# Altium PCB Starboard Solar Panel.PcbDoc (part 2 of 2)
Units mm, origin at the board's own origin, x right, y up, seen from the top; angles counter-clockwise.
Board outline 327.5 x 87 mm, 2 copper layers (Top Layer, Bottom Layer), stack 1.58 mm thick; 64 components, 43 nets, 245 pads, 1257 vias.
Unrouted connection lines stored in the file: 47.
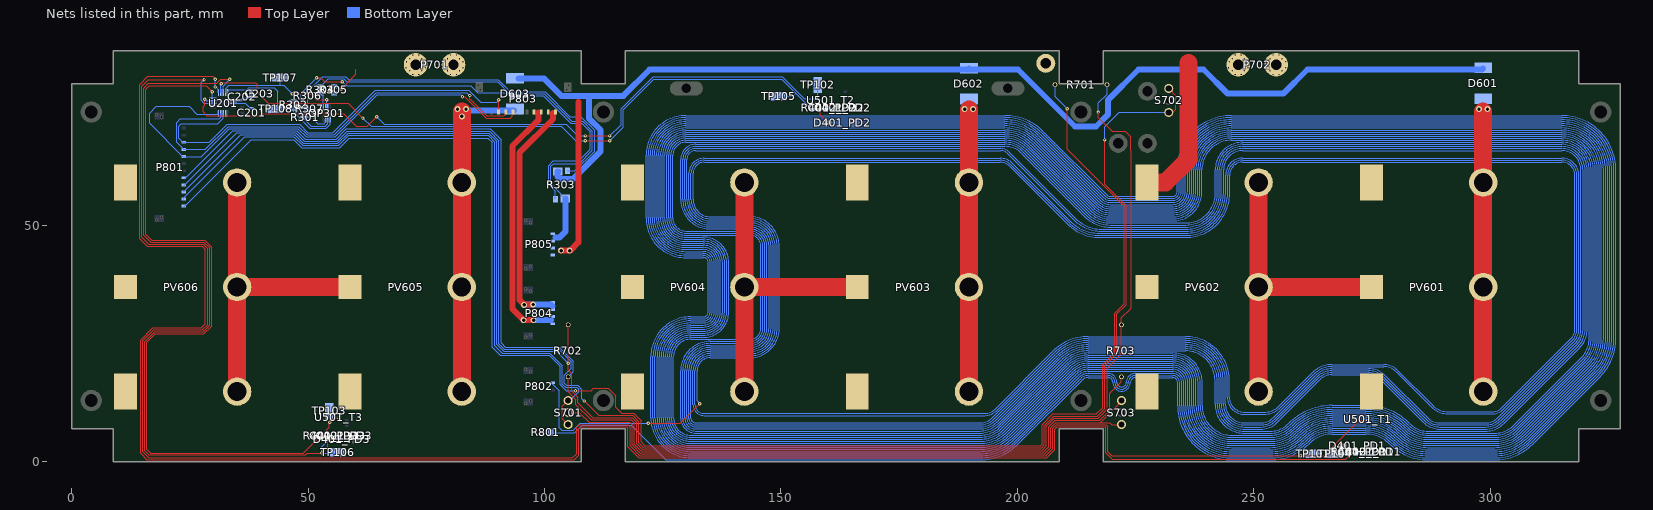
[diagram p2: the nets of this part, all layers, seen from the top]

## Via types
v1: diameter 0.711, hole 0.3, Top Layer to Bottom Layer, tented both sides, 677 vias
v2: diameter 0.8, hole 0.5, Top Layer to Bottom Layer, 519 vias
v3: diameter 0.655, hole 0.25, Top Layer to Bottom Layer, 48 vias
v4: diameter 1.27, hole 0.711, Top Layer to Bottom Layer, tented both sides, 13 vias

## Nets (pads, with @x,y where several pads share a name; then routed paths per layer and width w, separated by ;. In a path a pad name is that pad's centre, name@x,y a point inside that pad or via, vN(x,y) a via of type N, cw(c..) or ccw(c..) an arc to the next point about the centre after c; other vN are vias at no path point) (continued)
MAG2: P802.2 R801.1 | length 11911.1
  Top Layer w0.254: v1(121.9,8.2) 128.745,8.2 v1(132.855,12.31)
  Bottom Layer w0.254: R801.1@101.325,6.3 101.475,6.15 106.339,6.15 107.952,7.762 118.342,7.762 125.629,0.476 127.132,0.476 192.095,0.476 ; P802.2@101.656,16.575 103.149,15.082 103.149,7.201 103.687,6.663 106.063,6.663 107.6,8.2 v1(121.9,8.2) ; 127.264,22.296 127.264,9.32 ccw(c130.9,9.32) 130.9,5.684 192.095,5.684 ; 127.264,22.326 cw(c130.9,22.296) 130.9,25.932 143.4,25.932 ccw(c143.4,28.266) 145.734,28.266 145.734,45.64 ccw(c143.4,45.64) 143.4,47.974 129.84,47.974 cw(c129.87,51.61) 126.234,51.61 126.234,64.83 cw(c129.87,64.83) 126.234,64.86 cw(c129.87,64.83) 129.87,68.466 197.37,68.466 cw(c197.37,61.792) 202.089,66.511 215.5,53.1 ccw(c219.583,57.183) 219.583,51.409 232.8,51.409 ccw(c232.8,57.183) 238.574,57.183 238.574,61.792 cw(c245.248,61.792) 245.248,68.466 315.1,68.466 cw(c315.1,61.792) 321.774,61.792 321.774,26.1 cw(c315.1,26.1) 319.819,21.381 305.619,7.181 cw(c300.9,11.9) 300.9,5.226 286.8,5.226 cw(c286.8,11.9) 282.081,7.181 ccw(c273.679,-1.221) 273.679,10.661 266.6,10.661 ccw(c266.6,-1.221) 258.198,7.181 cw(c253.479,11.9) 253.479,5.226 245.3,5.226 cw(c245.3,11.9) 238.626,11.9 238.626,16.85 ccw(c232.852,16.85) 232.852,22.624 215,22.624 ccw(c215,15.95) 210.281,20.669 ; 129.87,68.032 197.37,68.032 cw(c197.37,61.792) 201.782,66.204 215.193,52.793 ccw(c219.583,57.183) 219.583,50.975 232.8,50.975 ccw(c232.8,57.183) 239.008,57.183 239.008,61.792 cw(c245.248,61.792) 245.248,68.032 ; 129.87,68.032 ccw(c129.87,64.83) 126.668,64.86 ccw(c129.87,64.83) 126.668,64.83 126.668,51.61 ccw(c129.87,51.61) 129.84,48.408 143.4,48.408 cw(c143.4,45.64) 146.168,45.64 146.168,28.266 cw(c143.4,28.266) 143.4,25.498 135.02,25.498 ccw(c135.02,19.258) 128.78,19.258 128.78,9.288 ccw(c131.95,9.288) 131.95,6.118 192.095,6.118 ; 131.384,19.258 131.384,12.134 ccw(c133.686,12.134) 133.686,9.832 ; 131.384,19.288 cw(c135.02,19.258) 135.02,22.894 143.4,22.894 ; 131.818,19.258 131.818,12.134 ccw(c133.686,12.134) 133.686,10.266 ; 131.818,19.288 cw(c135.02,19.258) 135.02,22.46 143.4,22.46 ; v1(132.855,12.31) 132.252,12.913 132.252,19.288 cw(c135.02,19.258) 135.02,22.026 143.4,22.026 ; 133.736,63.36 ccw(c133.736,61.026) 131.402,61.026 131.402,55.516 ccw(c135.038,55.516) 135.008,51.88 143.4,51.88 ; 133.736,63.794 ccw(c133.736,61.026) 130.968,61.026 130.968,55.516 ccw(c135.038,55.516) 135.038,51.446 143.4,51.446 cw(c143.4,45.64) 149.206,45.68 ; 133.736,64.228 ccw(c133.736,61.026) 130.534,61.026 130.534,55.516 ccw(c135.038,55.516) 135.038,51.012 143.4,51.012 cw(c143.4,45.64) 148.772,45.68 ; 133.8,9.832 193.208,9.832 ccw(c193.208,13.034) 195.472,10.77 ; 133.8,10.266 193.208,10.266 ccw(c193.208,13.034) 195.165,11.077 207.519,23.431 cw(c215,15.95) 215,26.53 235.552,26.53 cw(c235.552,17.252) 244.83,17.252 244.83,13.697 ccw(c248,13.697) 248,10.527 252.169,10.527 ccw(c252.169,15.031) 255.354,11.846 262.397,18.89 ; 133.9,63.36 196.37,63.36 cw(c196.37,60.592) 198.327,62.549 210.538,50.338 ccw(c217.383,57.183) 217.383,47.503 ; 133.9,63.794 196.37,63.794 cw(c196.37,60.592) 198.634,62.856 210.845,50.645 ccw(c217.383,57.183) 217.383,47.937 ; 133.9,64.228 196.37,64.228 cw(c196.37,60.592) 198.941,63.163 211.152,50.952 ccw(c217.383,57.183) 217.383,48.371 ; 143.4,23.328 135.02,23.328 ccw(c135.02,19.258) 130.95,19.258 130.95,9.288 ccw(c131.95,9.288) 131.95,8.288 192.095,8.288 ; 143.4,23.762 135.02,23.762 ccw(c135.02,19.258) 130.516,19.258 130.516,9.288 ccw(c131.95,9.288) 131.95,7.854 192.095,7.854 ; 143.4,24.196 135.02,24.196 ccw(c135.02,19.258) 130.082,19.258 130.082,9.288 ccw(c131.95,9.288) 131.95,7.42 192.095,7.42 ; 143.4,24.63 135.02,24.63 ccw(c135.02,19.258) 129.648,19.258 129.648,9.288 ccw(c131.95,9.288) 131.95,6.986 192.095,6.986 ; 143.4,25.064 135.02,25.064 ccw(c135.02,19.258) 129.214,19.258 129.214,9.288 ccw(c131.95,9.288) 131.95,6.552 192.095,6.552 ; 143.4,50.144 135.038,50.144 cw(c135.038,55.516) 129.666,55.516 129.666,63.962 cw(c132,63.962) 132,66.296 196.5,66.296 cw(c196.5,63.962) 198.15,65.612 ; 143.4,50.144 cw(c143.4,45.64) 147.904,45.68 ; 143.4,51.88 cw(c143.4,45.64) 149.64,45.68 ; 143.44,22.026 ccw(c143.4,28.266) 149.64,28.266 149.64,45.64 ; 143.44,22.46 ccw(c143.4,28.266) 149.206,28.266 149.206,45.64 ; 143.44,22.894 ccw(c143.4,28.266) 148.772,28.266 148.772,45.64 ; 143.44,23.328 ccw(c143.4,28.266) 148.338,28.266 148.338,45.64 ; 143.44,23.762 ccw(c143.4,28.266) 147.904,28.266 147.904,45.64 ; 143.44,24.196 ccw(c143.4,28.266) 147.47,28.266 147.47,45.64 ; 143.44,24.63 ccw(c143.4,28.266) 147.036,28.266 147.036,45.64 ; 143.44,25.064 ccw(c143.4,28.266) 146.602,28.266 146.602,45.64 ; 146.602,45.68 ccw(c143.4,45.64) 143.4,48.842 129.84,48.842 cw(c129.87,51.61) 127.102,51.61 127.102,64.83 cw(c129.87,64.83) 127.102,64.86 cw(c129.87,64.83) 129.87,67.598 197.37,67.598 cw(c197.37,61.792) 201.475,65.897 214.886,52.486 ccw(c219.583,57.183) 219.583,50.541 235.602,50.541 ccw(c235.602,56.781) 241.842,56.781 241.842,61.792 cw(c247.648,61.792) 241.842,61.834 cw(c247.648,61.792) 247.648,67.598 315.1,67.598 cw(c315.1,61.792) 320.906,61.792 320.906,26.1 cw(c315.1,26.1) 319.205,21.995 305.005,7.795 cw(c300.9,11.9) 300.9,6.094 286.8,6.094 cw(c286.8,11.9) 282.695,7.795 ccw(c273.679,-1.221) 273.679,11.529 266.6,11.529 ccw(c266.6,-1.221) 257.584,7.795 cw(c253.479,11.9) 253.479,6.094 248,6.094 cw(c248,12.302) 241.792,12.302 241.792,17.252 ccw(c235.552,17.252) 235.552,23.492 215,23.492 ccw(c215,15.95) 209.667,21.283 196.2,7.816 cw(c192.095,11.921) 192.095,6.115 ; 147.036,45.68 ccw(c143.4,45.64) 143.4,49.276 135.038,49.276 cw(c135.038,55.516) 128.798,55.516 128.798,63.962 cw(c132,63.962) 132,67.164 197.37,67.164 cw(c197.37,61.792) 201.169,65.591 214.58,52.18 ccw(c219.583,57.183) 219.583,50.107 235.602,50.107 ccw(c235.602,56.781) 242.276,56.781 242.276,61.792 cw(c247.648,61.792) 242.276,61.834 cw(c247.648,61.792) 247.648,67.164 315.1,67.164 cw(c315.1,61.792) 320.472,61.792 320.472,28 cw(c315.1,28) 318.899,24.201 302.799,8.101 cw(c299,11.9) 299,6.528 286.8,6.528 cw(c286.8,11.9) 283.001,8.101 ccw(c273.679,-1.221) 273.679,11.963 266.6,11.963 ccw(c266.6,-1.221) 257.278,8.101 cw(c253.479,11.9) 253.479,6.528 248,6.528 cw(c248,12.302) 242.226,12.302 242.226,17.252 ccw(c235.552,17.252) 235.552,23.926 215,23.926 ccw(c215,15.95) 209.36,21.59 ; 147.47,45.68 ccw(c143.4,45.64) 143.4,49.71 135.038,49.71 cw(c135.038,55.516) 129.232,55.516 129.232,63.962 cw(c132,63.962) 132,66.73 197.37,66.73 cw(c197.37,61.792) 200.862,65.284 214.273,51.873 ccw(c219.583,57.183) 219.583,49.673 235.602,49.673 ccw(c235.602,56.781) 242.71,56.781 242.71,61.792 cw(c247.648,61.792) 242.71,61.834 cw(c247.648,61.792) 247.648,66.73 315.1,66.73 cw(c315.1,61.792) 320.038,61.792 320.038,28 cw(c315.1,28) 318.592,24.508 302.492,8.408 cw(c299,11.9) 299,6.962 289.3,6.962 cw(c289.3,11.9) 285.808,8.408 276.858,17.358 ; 148.338,45.68 ccw(c143.4,45.64) 143.4,50.578 135.038,50.578 cw(c135.038,55.516) 130.1,55.516 130.1,63.962 cw(c132,63.962) 132,65.862 196.5,65.862 cw(c196.5,63.962) 197.844,65.305 ; 192.095,0.473 ccw(c192.095,11.921) 200.19,3.826 213.657,17.293 ; 192.095,0.907 ccw(c192.095,11.921) 199.883,4.133 213.35,17.6 ; 192.095,0.91 130.9,0.91 cw(c130.9,9.32) 122.49,9.32 122.49,22.296 cw(c130.9,22.296) 130.9,30.706 133.6,30.706 ccw(c133.6,31.706) 134.6,31.706 134.6,42.2 ccw(c133.6,42.2) 133.6,43.2 129.87,43.2 cw(c129.87,51.61) 121.46,51.61 121.46,64.83 cw(c129.87,64.83) 129.87,73.24 197.37,73.24 cw(c197.37,61.792) 205.465,69.887 218.876,56.476 ccw(c219.583,57.183) 219.583,56.183 232.8,56.183 ccw(c232.8,57.183) 233.8,57.183 233.8,61.792 cw(c245.248,61.792) 245.248,73.24 315.1,73.24 cw(c315.1,61.792) 326.548,61.792 326.548,26.1 cw(c315.1,26.1) 323.195,18.005 308.995,3.805 cw(c300.9,11.9) 300.9,0.452 286.8,0.452 cw(c286.8,11.9) 278.705,3.805 ccw(c273.679,-1.221) 273.679,5.887 266.6,5.887 ccw(c266.6,-1.221) 261.574,3.805 cw(c253.479,11.9) 253.479,0.452 245.3,0.452 cw(c245.3,11.9) 233.852,11.9 233.852,16.85 ccw(c232.852,16.85) 232.852,17.85 224.9,17.85 ccw(c224.9,16.85) 223.9,16.85 cw(c222.032,16.85) 222.032,14.982 cw(c222.032,16.85) 220.164,16.85 ccw(c219.164,16.85) 219.164,17.85 215,17.85 ccw(c215,15.95) 213.656,17.294 ; 192.095,1.341 ccw(c192.095,11.921) 199.576,4.44 213.043,17.907 ; 192.095,1.344 130.9,1.344 cw(c130.9,9.32) 122.924,9.32 122.924,22.296 cw(c130.9,22.296) 130.9,30.272 133.6,30.272 ccw(c133.6,31.706) 135.034,31.706 135.034,42.2 ccw(c133.6,42.2) 133.6,43.634 129.87,43.634 cw(c129.87,51.61) 121.894,51.61 121.894,64.83 cw(c129.87,64.83) 129.87,72.806 197.37,72.806 cw(c197.37,61.792) 205.158,69.58 218.569,56.169 ccw(c219.583,57.183) 219.583,55.749 232.8,55.749 ccw(c232.8,57.183) 234.234,57.183 234.234,61.792 cw(c245.248,61.792) 245.248,72.806 315.1,72.806 cw(c315.1,61.792) 326.114,61.792 326.114,26.1 cw(c315.1,26.1) 322.888,18.312 308.688,4.112 cw(c300.9,11.9) 300.9,0.886 286.8,0.886 cw(c286.8,11.9) 279.012,4.112 ccw(c273.679,-1.221) 273.679,6.321 266.6,6.321 ccw(c266.6,-1.221) 261.267,4.112 cw(c253.479,11.9) 253.479,0.886 245.3,0.886 cw(c245.3,11.9) 234.286,11.9 234.286,16.85 ccw(c232.852,16.85) 232.852,18.284 224.9,18.284 ccw(c224.9,16.85) 223.466,16.85 cw(c222.032,16.85) 222.032,15.416 cw(c222.032,16.85) 220.598,16.85 ccw(c219.164,16.85) 219.164,18.284 215,18.284 ccw(c215,15.95) 213.35,17.6 ; 192.095,1.775 ccw(c192.095,11.921) 199.269,4.747 212.736,18.214 ; 192.095,1.778 130.9,1.778 cw(c130.9,9.32) 123.358,9.32 123.358,22.296 cw(c130.9,22.296) 130.9,29.838 133.6,29.838 ccw(c133.6,31.706) 135.468,31.706 135.468,42.2 ccw(c133.6,42.2) 133.6,44.068 129.87,44.068 cw(c129.87,51.61) 122.328,51.61 122.328,64.83 cw(c129.87,64.83) 129.87,72.372 197.37,72.372 cw(c197.37,61.792) 204.851,69.273 218.262,55.862 ccw(c219.583,57.183) 219.583,55.315 232.8,55.315 ccw(c232.8,57.183) 234.668,57.183 234.668,61.792 cw(c245.248,61.792) 245.248,72.372 315.1,72.372 cw(c315.1,61.792) 325.68,61.792 325.68,26.1 cw(c315.1,26.1) 322.581,18.619 308.381,4.419 cw(c300.9,11.9) 300.9,1.32 286.8,1.32 cw(c286.8,11.9) 279.319,4.419 ccw(c273.679,-1.221) 273.679,6.755 266.6,6.755 ccw(c266.6,-1.221) 260.96,4.419 cw(c253.479,11.9) 253.479,1.32 245.3,1.32 cw(c245.3,11.9) 234.72,11.9 234.72,16.85 ccw(c232.852,16.85) 232.852,18.718 224.9,18.718 ccw(c224.9,16.85) 223.032,16.85 cw(c222.032,16.85) 222.032,15.85 cw(c222.032,16.85) 221.032,16.85 ccw(c219.164,16.85) 219.164,18.718 215,18.718 ccw(c215,15.95) 213.043,17.907 ; 192.095,2.209 ccw(c192.095,11.921) 198.962,5.054 212.429,18.521 cw(c215,15.95) 215,19.586 232.852,19.586 cw(c232.852,16.85) 235.588,16.85 235.588,11.9 ccw(c245.3,11.9) 245.3,2.188 253.479,2.188 ccw(c253.479,11.9) 260.346,5.033 cw(c266.6,-1.221) 266.6,7.623 273.679,7.623 cw(c273.679,-1.221) 279.933,5.033 ccw(c286.8,11.9) 286.8,2.188 300.9,2.188 ccw(c300.9,11.9) 307.767,5.033 321.967,19.233 ccw(c315.1,26.1) 324.812,26.1 324.812,61.792 ccw(c315.1,61.792) 315.1,71.504 245.248,71.504 ccw(c245.248,61.792) 235.536,61.792 235.536,57.183 cw(c232.8,57.183) 232.8,54.447 219.583,54.447 cw(c219.583,57.183) 217.648,55.248 204.237,68.659 ccw(c197.37,61.792) 197.37,71.504 129.87,71.504 ccw(c129.87,64.83) 123.196,64.83 123.196,51.61 ccw(c129.87,51.61) 129.87,44.936 133.6,44.936 cw(c133.6,42.2) 136.336,42.2 136.336,31.706 cw(c133.6,31.706) 133.6,28.97 130.9,28.97 ccw(c130.9,22.296) 124.226,22.296 124.226,9.32 ccw(c130.9,9.32) 130.9,2.646 192.095,2.646 ; 192.095,2.212 130.9,2.212 cw(c130.9,9.32) 123.792,9.32 123.792,22.296 cw(c130.9,22.296) 130.9,29.404 133.6,29.404 ccw(c133.6,31.706) 135.902,31.706 135.902,42.2 ccw(c133.6,42.2) 133.6,44.502 129.87,44.502 cw(c129.87,51.61) 122.762,51.61 122.762,64.83 cw(c129.87,64.83) 129.87,71.938 197.37,71.938 cw(c197.37,61.792) 204.544,68.966 ; 192.095,2.643 ccw(c192.095,11.921) 198.656,5.36 212.123,18.827 ; 192.095,3.077 ccw(c192.095,11.921) 198.349,5.667 211.816,19.134 ; 192.095,3.08 130.9,3.08 cw(c130.9,9.32) 124.66,9.32 124.66,22.296 cw(c130.9,22.296) 130.9,28.536 133.6,28.536 ccw(c133.6,31.706) 136.77,31.706 136.77,42.2 ccw(c133.6,42.2) 133.6,45.37 129.87,45.37 cw(c129.87,51.61) 123.63,51.61 123.63,64.83 cw(c129.87,64.83) 129.87,71.07 197.37,71.07 cw(c197.37,61.792) 203.931,68.353 217.342,54.942 ccw(c219.583,57.183) 219.583,54.013 232.8,54.013 ccw(c232.8,57.183) 235.97,57.183 235.97,61.792 cw(c245.248,61.792) 245.248,71.07 315.1,71.07 cw(c315.1,61.792) 324.378,61.792 324.378,26.1 cw(c315.1,26.1) 321.661,19.539 307.461,5.339 cw(c300.9,11.9) 300.9,2.622 286.8,2.622 cw(c286.8,11.9) 280.239,5.339 ccw(c273.679,-1.221) 273.679,8.057 266.6,8.057 ccw(c266.6,-1.221) 260.039,5.339 cw(c253.479,11.9) 253.479,2.622 245.3,2.622 cw(c245.3,11.9) 236.022,11.9 236.022,16.85 ccw(c232.852,16.85) 232.852,20.02 215,20.02 ccw(c215,15.95) 212.122,18.828 ; 192.095,3.511 ccw(c192.095,11.921) 198.042,5.974 211.509,19.441 cw(c215,15.95) 215,20.888 232.852,20.888 cw(c232.852,16.85) 236.89,16.85 236.89,11.9 ccw(c245.3,11.9) 245.3,3.49 253.479,3.49 ccw(c253.479,11.9) 259.426,5.953 cw(c266.6,-1.221) 266.6,8.925 273.679,8.925 cw(c273.679,-1.221) 280.853,5.953 ccw(c286.8,11.9) 286.8,3.49 300.9,3.49 ccw(c300.9,11.9) 306.847,5.953 321.047,20.153 ccw(c315.1,26.1) 323.51,26.1 323.51,61.792 ccw(c315.1,61.792) 315.1,70.202 245.248,70.202 ccw(c245.248,61.792) 236.838,61.792 236.838,57.183 cw(c232.8,57.183) 232.8,53.145 219.583,53.145 cw(c219.583,57.183) 216.728,54.328 203.317,67.739 ccw(c197.37,61.792) 197.37,70.202 129.87,70.202 ccw(c129.87,64.83) 124.498,64.83 124.498,51.61 ccw(c129.87,51.61) 129.87,46.238 133.6,46.238 cw(c133.6,42.2) 137.638,42.2 137.638,31.706 cw(c133.6,31.706) 137.638,31.674 cw(c133.6,31.706) 133.6,27.668 130.9,27.668 ccw(c130.9,22.296) 125.528,22.296 125.528,9.32 ccw(c130.9,9.32) 130.9,3.948 192.095,3.948 ; 192.095,3.514 130.9,3.514 cw(c130.9,9.32) 125.094,9.32 125.094,22.296 cw(c130.9,22.296) 130.9,28.102 133.6,28.102 ccw(c133.6,31.706) 137.204,31.674 ccw(c133.6,31.706) 137.204,31.702 137.204,42.2 ccw(c133.6,42.2) 133.6,45.804 129.87,45.804 cw(c129.87,51.61) 124.064,51.61 124.064,64.83 cw(c129.87,64.83) 129.87,70.636 197.37,70.636 cw(c197.37,61.792) 203.624,68.046 217.035,54.635 ccw(c219.583,57.183) 219.583,53.579 232.8,53.579 ccw(c232.8,57.183) 236.404,57.183 236.404,61.792 cw(c245.248,61.792) 245.248,70.636 315.1,70.636 cw(c315.1,61.792) 323.944,61.792 323.944,26.1 cw(c315.1,26.1) 321.354,19.846 307.154,5.646 cw(c300.9,11.9) 300.9,3.056 286.8,3.056 cw(c286.8,11.9) 280.546,5.646 ccw(c273.679,-1.221) 273.679,8.491 266.6,8.491 ccw(c266.6,-1.221) 259.733,5.646 cw(c253.479,11.9) 253.479,3.056 245.3,3.056 cw(c245.3,11.9) 236.456,11.9 236.456,16.85 ccw(c232.852,16.85) 232.852,20.454 215,20.454 ccw(c215,15.95) 211.815,19.135 ; 192.095,3.945 ccw(c192.095,11.921) 197.735,6.281 211.202,19.748 ; 192.095,4.379 ccw(c192.095,11.921) 197.428,6.588 210.895,20.055 ; 192.095,4.382 130.9,4.382 cw(c130.9,9.32) 125.962,9.32 125.962,22.296 cw(c130.9,22.296) 130.9,27.234 133.6,27.234 ccw(c133.6,31.706) 138.072,31.674 ccw(c133.6,31.706) 138.072,31.706 138.072,42.2 ccw(c133.6,42.2) 133.6,46.672 129.87,46.672 cw(c129.87,51.61) 124.932,51.61 124.932,64.83 cw(c129.87,64.83) 129.87,69.768 197.37,69.768 cw(c197.37,61.792) 203.01,67.432 216.421,54.021 ccw(c219.583,57.183) 219.583,52.711 232.8,52.711 ccw(c232.8,57.183) 237.272,57.183 237.272,61.792 cw(c245.248,61.792) 245.248,69.768 315.1,69.768 cw(c315.1,61.792) 323.076,61.792 323.076,26.1 cw(c315.1,26.1) 320.74,20.46 306.54,6.26 cw(c300.9,11.9) 300.9,3.924 286.8,3.924 cw(c286.8,11.9) 281.16,6.26 ccw(c273.679,-1.221) 273.679,9.359 266.6,9.359 ccw(c266.6,-1.221) 259.119,6.26 cw(c253.479,11.9) 253.479,3.924 245.3,3.924 cw(c245.3,11.9) 237.324,11.9 237.324,16.85 ccw(c232.852,16.85) 232.852,21.322 215,21.322 ccw(c215,15.95) 211.201,19.749 ; 192.095,4.813 ccw(c192.095,11.921) 197.121,6.895 210.588,20.362 cw(c215,15.95) 215,22.19 232.852,22.19 cw(c232.852,16.85) 238.192,16.85 238.192,11.9 ccw(c245.3,11.9) 245.3,4.792 253.479,4.792 ccw(c253.479,11.9) 258.505,6.874 cw(c266.6,-1.221) 266.6,10.227 273.679,10.227 cw(c273.679,-1.221) 281.774,6.874 ccw(c286.8,11.9) 286.8,4.792 300.9,4.792 ccw(c300.9,11.9) 305.926,6.874 320.126,21.074 ccw(c315.1,26.1) 322.208,26.1 322.208,61.792 ccw(c315.1,61.792) 315.1,68.9 245.248,68.9 ccw(c245.248,61.792) 238.14,61.792 238.14,57.183 cw(c232.8,57.183) 232.8,51.843 219.583,51.843 cw(c219.583,57.183) 215.807,53.407 202.396,66.818 ccw(c197.37,61.792) 197.37,68.9 129.87,68.9 ccw(c129.87,64.83) 125.8,64.83 125.8,51.61 ccw(c129.87,51.61) 129.87,47.54 133.6,47.54 cw(c133.6,42.2) 138.94,42.2 138.94,31.701 cw(c133.6,31.706) 138.94,31.674 cw(c133.6,31.706) 133.6,26.366 130.9,26.366 ccw(c130.9,22.296) 126.83,22.296 126.83,9.32 ccw(c130.9,9.32) 130.9,5.25 192.095,5.25 ; 192.095,4.816 130.9,4.816 cw(c130.9,9.32) 126.396,9.32 126.396,22.296 cw(c130.9,22.296) 130.9,26.8 133.6,26.8 ccw(c133.6,31.706) 138.506,31.674 ccw(c133.6,31.706) 138.506,31.697 138.506,42.2 ccw(c133.6,42.2) 133.6,47.106 129.87,47.106 cw(c129.87,51.61) 125.366,51.61 125.366,64.83 cw(c129.87,64.83) 129.87,69.334 197.37,69.334 cw(c197.37,61.792) 202.703,67.125 216.114,53.714 ccw(c219.583,57.183) 219.583,52.277 232.8,52.277 ccw(c232.8,57.183) 237.706,57.183 237.706,61.792 cw(c245.248,61.792) 245.248,69.334 315.1,69.334 cw(c315.1,61.792) 322.642,61.792 322.642,26.1 cw(c315.1,26.1) 320.433,20.767 306.233,6.567 cw(c300.9,11.9) 300.9,4.358 286.8,4.358 cw(c286.8,11.9) 281.467,6.567 ccw(c273.679,-1.221) 273.679,9.793 266.6,9.793 ccw(c266.6,-1.221) 258.812,6.567 cw(c253.479,11.9) 253.479,4.358 245.3,4.358 cw(c245.3,11.9) 237.758,11.9 237.758,16.85 ccw(c232.852,16.85) 232.852,21.756 215,21.756 ccw(c215,15.95) 210.895,20.055 ; 192.095,5.247 ccw(c192.095,11.921) 196.814,7.202 210.281,20.669 ; 192.095,5.681 ccw(c192.095,11.921) 196.507,7.509 209.974,20.976 ; 192.095,6.549 ccw(c192.095,11.921) 195.894,8.122 209.361,21.589 ; 192.095,6.983 ccw(c192.095,11.921) 195.587,8.429 209.054,21.896 ; 192.095,7.417 ccw(c192.095,11.921) 195.28,8.736 208.747,22.203 ; 192.095,7.851 ccw(c192.095,11.921) 194.973,9.043 208.44,22.51 ; 192.095,8.285 ccw(c192.095,11.921) 194.666,9.35 ; 194.666,9.35 208.133,22.817 cw(c215,15.95) 215,25.662 235.552,25.662 cw(c235.552,17.252) 243.962,17.252 243.962,12.302 ccw(c248,12.302) 248,8.264 251.487,8.264 ccw(c251.487,11.9) 254.058,9.329 ; 195.472,10.77 207.826,23.124 cw(c215,15.95) 215,26.096 235.552,26.096 cw(c235.552,17.252) 244.396,17.252 244.396,13.697 ccw(c248,13.697) 248,10.093 252.169,10.093 ccw(c252.169,15.031) 255.661,11.539 262.704,18.583 ; 197.848,65.306 211.891,51.263 ; 198.155,65.617 212.198,51.574 212.198,51.566 ccw(c217.815,57.183) 217.815,49.239 235.602,49.239 ccw(c235.602,56.781) 243.144,56.781 243.144,61.792 cw(c247.648,61.792) 243.144,61.834 cw(c247.648,61.792) 247.648,66.296 315.1,66.296 cw(c315.1,61.792) 319.604,61.792 319.604,28 cw(c315.1,28) 318.285,24.815 302.185,8.715 cw(c299,11.9) 299,7.396 289.3,7.396 cw(c289.3,11.9) 286.115,8.715 277.165,17.665 ; 204.544,68.966 217.955,55.555 ccw(c219.583,57.183) 219.583,54.881 232.8,54.881 ccw(c232.8,57.183) 235.102,57.183 235.102,61.792 cw(c245.248,61.792) 245.248,71.938 315.1,71.938 cw(c315.1,61.792) 325.246,61.792 325.246,26.1 cw(c315.1,26.1) 322.274,18.926 308.074,4.726 cw(c300.9,11.9) 300.9,1.754 286.8,1.754 cw(c286.8,11.9) 279.626,4.726 ccw(c273.679,-1.221) 273.679,7.189 266.6,7.189 ccw(c266.6,-1.221) 260.653,4.726 cw(c253.479,11.9) 253.479,1.754 245.3,1.754 cw(c245.3,11.9) 235.154,11.9 235.154,16.85 ccw(c232.852,16.85) 232.852,19.152 215,19.152 ccw(c215,15.95) 212.736,18.214 ; 208.439,22.511 cw(c215,15.95) 215,25.228 235.552,25.228 cw(c235.552,17.252) 243.528,17.252 243.528,12.302 ccw(c248,12.302) 248,7.83 251.487,7.83 ccw(c251.487,11.9) 254.365,9.022 ; 208.746,22.204 cw(c215,15.95) 215,24.794 235.552,24.794 cw(c235.552,17.252) 243.094,17.252 243.094,12.302 ccw(c248,12.302) 248,7.396 251.487,7.396 ccw(c251.487,11.9) 254.672,8.715 263.622,17.665 cw(c266.5,14.787) 266.5,18.857 274.287,18.857 cw(c274.287,14.787) 277.165,17.665 ; 209.053,21.897 cw(c215,15.95) 215,24.36 215.5,24.36 235.552,24.36 cw(c235.552,17.252) 242.66,17.252 242.66,12.302 ccw(c248,12.302) 248,6.962 251.487,6.962 ccw(c251.487,11.9) 254.979,8.408 ; 209.974,20.976 cw(c215,15.95) 215,23.058 232.852,23.058 cw(c232.852,16.85) 239.06,16.85 239.06,11.9 ccw(c245.3,11.9) 245.3,5.66 253.479,5.66 ccw(c253.479,11.9) 257.891,7.488 cw(c266.6,-1.221) 266.6,11.095 273.679,11.095 cw(c273.679,-1.221) 282.388,7.488 ccw(c286.8,11.9) 286.8,5.66 300.9,5.66 ccw(c300.9,11.9) 305.312,7.488 319.512,21.688 ccw(c315.1,26.1) 321.34,26.1 321.34,61.792 ccw(c315.1,61.792) 315.1,68.032 245.248,68.032 ; 211.891,51.259 ccw(c217.815,57.183) 217.815,48.805 235.602,48.805 ccw(c235.602,56.781) 243.578,56.781 243.578,61.792 cw(c247.648,61.792) 243.578,61.834 cw(c247.648,61.792) 247.648,65.862 315.1,65.862 cw(c315.1,61.792) 319.17,61.792 319.17,28 cw(c315.1,28) 317.978,25.122 301.878,9.022 cw(c299,11.9) 299,7.83 289.3,7.83 cw(c289.3,11.9) 286.422,9.022 277.472,17.972 ccw(c274.287,14.787) 274.287,19.291 266.5,19.291 ccw(c266.5,14.787) 263.315,17.972 254.365,9.022 ; 217.4,47.503 235.602,47.503 ccw(c235.602,56.781) 244.88,56.781 244.88,60.642 ; 217.4,47.937 235.602,47.937 ccw(c235.602,56.781) 244.446,56.781 244.446,60.642 ; 217.4,48.371 235.602,48.371 ccw(c235.602,56.781) 244.012,56.781 244.012,60.642 cw(c247.648,60.642) 244.012,60.684 cw(c247.648,60.642) 247.648,64.278 315.1,64.278 cw(c315.1,60.642) 318.736,60.642 318.736,28 cw(c315.1,28) 317.671,25.429 301.571,9.329 cw(c299,11.9) 299,8.264 289.3,8.264 cw(c289.3,11.9) 286.729,9.329 277.779,18.279 ; 244.446,60.684 244.446,60.642 ; 244.88,60.684 244.88,60.642 ; 254.058,9.329 263.008,18.279 cw(c266.5,14.787) 266.5,19.725 274.287,19.725 ; 254.979,8.408 263.929,17.358 cw(c266.5,14.787) 266.5,18.423 274.287,18.423 cw(c274.287,14.787) 276.858,17.358 ; 262.395,18.892 cw(c266.5,14.787) 266.5,20.593 277.487,20.593 cw(c277.487,16.523) 280.365,19.401 ; 262.701,18.586 cw(c266.5,14.787) 266.5,20.159 277.487,20.159 cw(c277.487,16.523) 280.058,19.094 287.508,11.644 ccw(c291,15.136) 291,10.198 300.5,10.198 ccw(c300.5,13.4) 302.764,11.136 317.364,25.736 ccw(c315.1,28) 318.302,28 318.302,60.642 ccw(c315.1,60.642) 315.1,63.844 247.648,63.844 ccw(c247.648,60.642) 244.446,60.642 ; 274.287,19.725 cw(c274.287,14.787) 277.779,18.279 ; 280.365,19.401 287.815,11.951 ccw(c291,15.136) 291,10.632 300.5,10.632 ccw(c300.5,13.4) 302.457,11.443 317.057,26.043 ccw(c315.1,28) 317.868,28 317.868,60.642 ccw(c315.1,60.642) 315.1,63.41 247.648,63.41 ccw(c247.648,60.642) 244.88,60.642
NetC201_2: C201.2 U201.8 | length 4.3
  Bottom Layer w0.254: U201.8@34.25,75.9 36.7,75.9 37.85,74.75 C201.2@38.05,74.75
NetC202_1: C202.1 C203.1 U201.7 | length 4.7
  Bottom Layer w0.254: U201.7@34.25,76.4 35.95,76.4 36.627,77.077 37.677,77.077 38.025,77.425 C203.1@38.025,77.9
NetD601_1: D601.1 PV601.1 | length 59.3
  Top Layer w3.81: PV601.1@298.5,14.889 PV601.1@298.5,37 PV601.1@298.5,59.111 298.5,74.15
  other v4: 297.6,74.6 299.4,74.6
NetD602_1: D602.1 PV603.1 | length 59.6
  Top Layer w3.81: PV603.1@189.75,14.889 PV603.1@189.75,37 PV603.1@189.75,59.111 189.75,74.5
  other v4: 188.85,74.6 190.65,74.6
NetD603_1: D603.1 PV605.1 | length 70.9
  Top Layer w3.81: PV605.1@82.5,14.889 PV605.1@82.5,37 PV605.1@82.5,59.111 82.5,74.1
  Bottom Layer w0.254: 82.5,73.8 v4@83.05,74.35 ; D603.1@93.5,74.35 D603.1@93.8,74.65
  Bottom Layer w1.27: v4@83.05,74.35 D603.1@93.5,74.35
  other v4: 82.5,73.1 81.6,74.6 83.4,74.6
NetOP301_2: OP301.2 R301.2 R302.1 | length 11.6
  Bottom Layer w0.254: R302.1@46.922,76.25 47.047,76.25 47.42,75.877 47.42,75.808 47.852,75.376 47.852,74.015 48.542,73.325 48.552,73.325 48.994,72.884 R301.2@49.029,72.884 49.064,72.884 49.187,72.761 49.187,72.511 50.681,71.017 53.662,71.017 54.2,71.556 OP301.2@54.2,72.53
NetOP301_3: OP301.3 R306.2 R307.1 | length 9.2
  Bottom Layer w0.254: R306.2@49.97,77.049 49.97,75.07 R307.1@49.65,74.75 49.65,74.625 51.21,73.065 51.21,72.357 52.042,71.525 53.476,71.525 53.677,71.726 53.677,72.507 OP301.3@53.7,72.53
NetOP301_5: OP301.5 R304.2 R305.2 | length 3.3
  Bottom Layer w0.254: R304.2@52.65,77.975 52.775,77.975 53.2,77.55 OP301.5@53.2,75.02
NetPV601_2: PV601.2 PV602.1 | length 68.1
  Top Layer w3.81: PV602.1@251,14.889 PV602.1@251,37 ; PV602.1@251,59.111 PV602.1@251,37 ; PV601.2@274.878,37 PV602.1@251,37
NetPV603_2: PV603.2 PV604.1 | length 68.1
  Top Layer w3.81: PV604.1@142.25,14.889 PV604.1@142.25,37 ; PV604.1@142.25,59.111 PV604.1@142.25,37 ; PV603.2@166.128,37 PV604.1@142.25,37
NetPV605_2: PV605.2 PV606.1 | length 68.1
  Top Layer w3.81: PV606.1@35,14.889 PV606.1@35,37 ; PV606.1@35,59.111 PV606.1@35,37 ; PV605.2@58.878,37 PV606.1@35,37
NetR301_1: R301.1 R303.3 | length 95.1
  Top Layer w0.254: v1(51.8,81.25) 52.65,81.25 53.5,80.4 v1(57.25,80.4) v1@57.4,80.25
  Bottom Layer w0.254: R301.1@49.78,72.884 49.78,73.515 49.538,73.757 48.762,73.757 48.572,73.947 48.572,78.022 v1(51.8,81.25) ; v1(57.25,80.4) 58.14,79.51 84.451,79.51 85.921,78.04 88.956,78.04 88.976,78.06 89.524,78.06 89.544,78.04 91.794,78.04 92.408,77.426 99.745,77.426 105.571,71.6 107.9,71.6 109.686,69.814 109.686,66.126 107.26,63.7 101.889,63.7 100.868,62.679 100.868,58.687 102.316,57.239 R303.3@102.316,55.601
NetR303_4: R303.4 R306.1 | length 79
  Bottom Layer w0.254: R306.1@49.95,77.801 49.95,78.367 53.075,81.492 57.918,81.492 58.61,80.8 90.255,80.8 92.766,78.29 100.103,78.29 105.337,73.056 107.665,73.056 110.575,70.147 110.575,65.757 106.416,61.599 R303.4@104.856,61.599
NetS701_1: S701.1 S703.2 S703.3 | length 134.9
  Top Layer w0.254: S701.1@105,10.46 107.34,10.46 109.419,8.381 117.969,8.381 118.514,7.836 118.514,3.6 120.361,1.753 205.749,1.753 207.036,3.04 207.036,7.254 208.124,8.341 217.67,8.341 219.509,8.341 219.93,7.92 S703.3@222,7.92 ; 217.67,8.37 222,12.7 S703.2@222,13
NetU201_12: U201.12
NetU201_17: U201.17
SPI_CLK: P801.8 P803.7 U201.15 | length 109
  Top Layer w0.254: v1(82.65,77.25) 83.086,77.25 87.636,72.7 92.8,72.7 93.219,73.119 93.219,73.919 P803.7@93.3,74
  Bottom Layer w0.254: U201.15@31.05,73.7 31.05,74.321 31.048,74.323 U201.15@31.05,73.7 31.048,73.526 26.481,73.526 24.827,75.18 17.905,75.18 16.5,73.775 16.5,71.6 23.5,64.6 P801.8@23.7,64.6 27.378,64.6 33.285,70.506 47.841,70.506 49.591,68.757 55.753,68.757 64.62,77.623 82.277,77.623 v1(82.65,77.25)
SPI_MISO: P801.9 P803.8 U201.14 | length 94.4
  Top Layer w0.254: v1(84.15,77.5) 84.187,77.463 84.187,76.763 87.755,73.195 91.4,73.195 91.65,73.445 91.65,73.85 P803.8@91.8,74
  Bottom Layer w0.254: U201.14@31.55,73.7 31.548,73.698 31.548,72.856 31.242,72.55 22.986,72.55 22.193,71.756 22.193,67.607 P801.9@23.7,66.1 28.232,66.1 33.07,70.938 48.056,70.938 49.78,69.214 55.564,69.214 64.45,78.1 83.55,78.1 v1(84.15,77.5)
SPI_MOSI: P801.10 P803.9 U201.13 | length 91.5
  Top Layer w0.254: P803.9@90.3,74 v1(90.3,76.6)
  Bottom Layer w0.254: U201.13@32.05,73.7 32.048,73.698 32.048,72.709 30.906,71.567 23.167,71.567 22.65,71.05 22.65,68.45 23.5,67.6 P801.10@23.7,67.6 29.085,67.6 32.855,71.37 48.271,71.37 49.97,69.671 55.268,69.671 64.167,78.571 84.013,78.571 86.484,76.1 89.9,76.1 v1(90.3,76.6)
StarboardKnifeReturn: P801.5 R702.1 R703.1 | length 277.7
  Top Layer w0.254: R702.1@105,18 105,14.814 106.6,13.214 106.6,12.151 109.831,8.921 118.367,8.921 118.971,8.317 118.971,3.789 120.576,2.185 205.535,2.185 206.579,3.229 206.579,7.407 207.97,8.798 217.427,8.798 219.5,10.871 219.5,14.5 222,17 R703.1@222,18
  Bottom Layer w0.254: P801.5@23.896,59.904 34.066,70.075 47.626,70.075 49.402,68.299 55.943,68.299 58.064,70.421 88.521,70.421 90.821,68.121 90.821,25.182 91.708,24.295 103.149,24.295 106.092,21.352 106.092,19.092 R702.1@105,18
SwitchDeployable_S: P801.2 S701.2 S701.3 | length 150.8
  Top Layer w0.254: S701.2@105,13 103.743,11.743 103.743,9.177 S701.3@105,7.92 S701.3@105.461,8.381
  Bottom Layer w0.254: P801.2@23.7,55.6 23.7,55.869 36.588,68.757 47.005,68.757 48.833,66.928 56.511,66.928 58.632,69.05 88.061,69.05 89.45,67.661 89.45,24.614 91.064,23 101.142,23 103.763,20.379 103.763,16.488 104.491,15.76 106.824,15.76 107.21,15.374 107.21,14.826 105.384,13 S701.2@105,13
SwitchUHF_S: P801.4 S702.2 S702.3 | length 352.9
  Top Layer w0.254: v1(108.4,12.9) 111.465,9.835 118.674,9.835 119.97,8.539 119.97,4.083 121.005,3.048 205.098,3.048 205.665,3.615 205.665,7.714 207.663,9.713 216.866,9.713 218.45,11.297 218.45,20.4 221.05,23 221.05,31.3 223.005,33.255 223.005,54.195 218.5,58.7 v1(218.5,68.1) ; S702.3@232,73.92 232.82,73.92 233.5,74.6 233.5,77.5 S702.2@232,79
  Bottom Layer w0.254: P801.4@23.85,58.458 23.85,58.55 34.943,69.643 47.412,69.643 49.212,67.842 56.132,67.842 58.254,69.964 88,69.964 88.025,69.939 88.393,69.939 90.364,67.968 90.364,25.029 91.529,23.863 102.971,23.863 105.66,21.174 105.66,19.815 ; 105.645,19.815 104.195,18.365 104.195,16.667 104.667,16.195 106.999,16.195 107.907,15.287 107.907,13.393 v1(108.4,12.9) ; v1(218.5,68.1) 218.5,70.869 221.551,73.92 S702.3@232,73.92
UHFKnifeReturn_S: P801.1 R701.1 | length 342.6
  Top Layer w0.254: v1(106.55,15.1) 109.864,15.1 110.318,15.555 113.508,15.555 115.03,14.033 115.03,11.553 116.291,10.292 118.828,10.292 120.427,8.693 120.427,4.273 121.22,3.48 204.883,3.48 205.208,3.804 205.208,7.868 207.51,10.17 216.677,10.17 217.993,11.486 217.993,20.589 220.593,23.189 220.593,31.489 222.548,33.444 222.548,54.042 210.5,66.089 v1(210.5,74.7)
  Bottom Layer w0.254: P801.1@23.7,54.1 23.9,54.1 37.992,68.192 46.922,68.192 48.644,66.471 56.7,66.471 58.729,68.5 88,68.5 88.9,67.6 88.9,24.3 90.632,22.568 100.964,22.568 103.332,20.2 103.332,16.309 104.541,15.1 v1(106.55,15.1) ; R701.1@207.95,79.8 207.95,77.25 v1(210.5,74.7)
V+: D601.2 D602.2 D603.2 R303.1 | length 250
  Bottom Layer w1.27: D603.2@94.539,81.111 99.866,81.111 103.551,77.426 109.387,77.426 ; R303.1@102.751,61.455 102.931,61.455 102.751,61.275 102.751,60.349 103.3,59.8 105.946,59.8 111.85,65.704 111.85,70.2 109.387,72.663 109.387,77.426 ; D601.2@298.5,83.25 298.25,83 261.348,83 256.248,77.9 244.448,77.9 239.348,83 225.6,83 219.135,76.535 219.135,73.465 216.608,70.937 212.181,70.937 200.119,83 190,83 D602.2@189.75,83.25 189.5,83 122.25,83 116.676,77.426 109.387,77.426
V-: P701.1 P702.1 P805.1 P805.2 pad.3@206,84.3 PV602.2 PV604.2 PV606.2 R305.1 | length 72.5
  Top Layer w0.254: v1(57,78.85) 60.1,81.95 60.1,83
  Top Layer w1.27: v4(103.5,44.7) 105.4,44.7 107.15,46.45 107.15,76.15
  Top Layer w3.81: PV602.2@227.378,59.111 228.648,59.111 231.261,59.111 236.15,64 236.15,84.4
  Bottom Layer w0.254: R305.1@55.45,79.475 55.554,79.371 56.479,79.371 v1(57,78.85)
  other v3: 72.115,81.968 73.385,81.968 80.115,81.968 81.385,81.968 246.065,81.968 247.335,81.968 254.065,81.968 255.335,81.968 71.48,82.73 74.02,82.73 79.48,82.73 82.02,82.73 245.43,82.73 247.97,82.73 253.43,82.73 255.97,82.73 70.718,83.365 74.782,83.365 78.718,83.365 82.782,83.365 244.668,83.365 248.732,83.365 252.668,83.365 256.732,83.365 70.845,84.635 74.782,84.635 78.845,84.635 82.782,84.635 244.795,84.635 248.732,84.635 252.795,84.635 256.732,84.635 71.48,85.27 74.02,85.27 79.48,85.27 82.02,85.27 245.43,85.27 247.97,85.27 253.43,85.27 255.97,85.27 72.115,86.032 73.385,86.032 80.115,86.032 81.385,86.032 246.065,86.032 247.335,86.032 254.065,86.032 255.335,86.032
  other v4: 105.3,44.7
V_out: P805.3 P805.4 R303.2 R304.1 | length 94.8
  Bottom Layer w0.254: R304.1@52.65,79.475 54.235,81.06 57.524,81.06 58.224,80.36 90.084,80.36 92.587,77.858 99.924,77.858 105.75,72.032 108.079,72.032 110.143,69.968 110.143,65.936 107.306,63.1 101.9,63.1 101.3,62.5 101.3,58.866 103.543,56.623 103.543,56.443 104.241,55.745 R303.2@104.421,55.745
  Bottom Layer w1.27: 102.3,47.5 103.2,47.5 104.421,48.721 R303.2@104.421,55.745
VIN0: TP101.1 U201.18 U501_T1.B1 | length 410.2
  Top Layer w0.203: v1(28,80.85) 16.2,80.85 14.786,79.436 14.786,47.564 16.314,46.036 27.797,46.036 28.732,45.102 28.732,29.071 27.629,27.968 17.37,27.968 15.009,25.607 15.009,2.181 16.265,0.924 105.906,0.924 106.768,1.786 106.768,7.318 107.306,7.856 117.594,7.856 118.082,7.368 118.082,3.421 120.157,1.346 205.996,1.346 207.468,2.818 207.468,7.111 208.267,7.909 218.661,7.909 219.061,7.509 219.061,2.15 219.911,1.3 v1(259.9,1.3) 264.8,1.3 272.3,8.8 U501_T1.B1@273.85,8.8
  Bottom Layer w0.254: v1(28,80.85) 27.411,80.261 27.411,76.461 27.97,75.902 29.848,75.902 U201.18@29.85,75.9 ; v1(259.9,1.3) 262.126,1.3 TP101.1@262.6,1.774
VIN1: TP102.1 U201.19 U501_T2.B1 | length 155.4
  Top Layer w0.203: v1(159.2,75.7) 160.351,75.7 160.739,76.089 160.739,76.239 U501_T2.B1@160.75,76.25
  Top Layer w0.254: v1(28.151,76.67) 28.151,75.467 27.79,75.106 27.79,74.026 28.576,73.24 39.74,73.24 40.1,73.6 57.592,73.6 60.142,71.05 62.55,71.05 v1(64.5,73) ; v1(108.6,68.95) v1(113.8,68.95)
  Bottom Layer w0.254: v1(28.151,76.67) 28.419,76.402 29.848,76.402 U201.19@29.85,76.4 ; v1(64.5,73) 66.093,71.407 104.543,71.407 107,68.95 v1(108.6,68.95) ; v1(113.8,68.95) 116.182,71.332 116.182,74.671 122.961,81.45 150.311,81.45 154.961,76.8 157.8,76.8 ; TP102.1@157.038,78.988 TP102.1@157.8,79.75 157.8,76.8 ; v1(159.2,75.7) 158.1,76.8 157.8,76.8
VIN2: TP103.1 U201.20 U501_T3.B1 | length 163.3
  Top Layer w0.203: v1(29.75,78.3) 28.45,79.6 16.4,79.6 15.65,78.85 15.65,48.15 16.9,46.9 28.155,46.9 29.623,45.432 29.623,28.741 27.959,27.077 17.7,27.077 15.9,25.277 15.9,2.7 16.7,1.9 48.95,1.9 54.45,7.4 54.45,8.3 v1(54.55,8.4) 55.4,9.25 U501_T3.B1@56.3,9.25
  Bottom Layer w0.254: U201.20@29.75,76.955 v1(29.75,78.3) ; TP103.1@54.45,10.8 54.55,10.7 v1(54.55,8.4)
VIN3: C401_PD1.1 C402_PD1.2 D401_PD1.1 R401_PD1.2 TP104.1 U201.1 | length 413
  Top Layer w0.254: v1(30.375,80.975) 29.814,81.536 16.136,81.536 14.355,79.755 14.355,47.245 15.995,45.605 27.618,45.605 28.3,44.923 28.3,29.25 27.45,28.4 17.191,28.4 14.577,25.786 14.577,1.823 15.9,0.5 17.4,0.5 52.679,0.5 106.3,0.5 107.2,1.4 107.2,7.08 107.57,7.45 117.37,7.45 117.65,7.17 117.65,3.242 119.952,0.94 206.201,0.94 207.9,2.639 207.9,6.968 208.422,7.49 218.425,7.49 218.629,7.286 218.629,1.971 220.05,0.55 269.45,0.55 v1(270.6,1.7) 270.6,2.558 270.079,3.079 269.249,3.079 D401_PD1.1@268.9,3.428
  Bottom Layer w0.254: v1(30.375,80.975) 30.362,80.962 30.362,79.312 v1(30.35,79.3) 30.471,79.3 31.05,78.721 U201.1@31.05,78.1 ; TP104.1@267.2,1.7 v1(270.6,1.7) 270.662,1.762 272.235,1.762 272.254,1.743 272.369,1.743 272.4,1.774 272.512,1.662 273.688,1.662 C402_PD1.2@273.75,1.6 273.8,1.55 C401_PD1.1@275.25,1.55
VIN4: C401_PD2.1 C402_PD2.2 D401_PD2.1 R401_PD2.2 TP105.1 U201.2 | length 157.3
  Top Layer w0.254: v1(31.65,80) 31.85,80.2 38.85,80.2 39.2,79.85 39.2,78.2 41.55,75.85 58.45,75.85 v1(61.6,72.7) ; v1(108.6,67.95) v1(113.8,67.95) ; v1(158.3,74.5) 158.3,73.45 D401_PD2.1@160,71.75
  Bottom Layer w0.254: U201.2@31.55,78.1 31.55,79.776 31.65,79.876 v1(31.65,80) ; v1(61.6,72.7) 63.35,70.95 103.586,70.95 106.586,67.95 v1(108.6,67.95) ; v1(113.8,67.95) 116.614,70.764 116.614,74.492 123.096,80.975 150.175,80.975 153.15,78 ; TP105.1@149.5,77.325 152.475,77.325 153.15,78 ; C401_PD2.1@163.05,74.35 161.6,74.35 161.488,74.462 160.312,74.462 160.2,74.574 160.2,74.5 v1(158.3,74.5) 156.65,74.5 153.15,78
VIN5: C401_PD3.1 C402_PD3.2 D401_PD3.1 R401_PD3.2 TP106.1 U201.3 | length 175.5
  Top Layer w0.254: v1(33.4,80.95) 31.55,80.95 30.698,80.098 16.248,80.098 15.218,79.068 15.218,47.932 16.682,46.468 27.976,46.468 29.164,45.281 29.164,28.892 27.808,27.536 17.549,27.536 15.44,25.428 15.44,2.36 16.306,1.494 49.463,1.494 49.869,1.9 v1(52.85,1.9) 52.85,1.95 54.15,3.25 D401_PD3.1@54.15,4.85 D401_PD3.1@54.15,5.225
  Bottom Layer w0.254: U201.3@32.05,78.1 32.05,79.43 32.682,80.062 32.682,80.232 v1(33.4,80.95) ; TP106.1@56.3,2.1 56.1,1.9 v1(52.85,1.9) 52.85,3.174 R401_PD3.2@54.85,5.174 54.962,5.062 56.138,5.062 C402_PD3.2@56.25,4.95 C401_PD3.1@57.7,4.95
VIN6: OP301.6 OP301.7 TP107.1 U201.4 | length 27.1
  Top Layer w0.254: v1(46.65,77.85) 50.5,77.85 51.773,76.577 v1(53.95,76.577)
  Bottom Layer w0.254: U201.4@32.55,78.1 32.552,78.102 32.552,78.944 33.245,79.637 44.15,79.637 ; TP107.1@44.1,81.3 44.1,79.687 44.15,79.637 ; v1(46.65,77.85) 44.863,79.637 44.15,79.637 ; 53.95,74.95 v1(53.95,76.577)
VIN7: OP301.1 R302.2 TP108.1 U201.5 | length 30.1
  Bottom Layer w0.254: U201.5@33.05,78.1 33.05,78.453 33.32,78.723 36.956,78.723 37.413,79.18 42.813,79.18 43.557,78.436 43.557,75.077 43.343,74.863 43.457,74.75 R302.2@46.922,74.75 46.922,74.012 50.348,70.585 53.841,70.585 54.7,71.445 OP301.1@54.7,72.53
VKnife: P801.3 R701.2 R702.2 R703.2 | length 351.1
  Top Layer w0.254: R702.2@104.975,29 104.975,20.9 104.975,19.451 105.805,18.621 105.805,14.911 107.032,13.684 107.032,12.518 110.172,9.378 118.521,9.378 119.513,8.386 119.513,3.894 120.79,2.616 205.32,2.616 206.122,3.419 206.122,7.561 207.817,9.255 217.055,9.255 219,11.2 219,19.868 221.975,22.842 221.975,29 221.975,30.462 223.962,32.449 223.962,65.946 223.962,68.754 222.816,69.9 220.008,69.9 217.1,72.808 v1(217.1,74)
  Bottom Layer w0.254: P801.3@23.7,57.1 35.788,69.188 47.219,69.188 49.023,67.385 56.321,67.385 58.443,69.507 88.215,69.507 89.907,67.815 89.907,24.875 91.35,23.432 102.468,23.432 v1(105,20.9) ; v1(217.1,74) 217.1,75.936 218.95,77.786 R701.2@218.95,79.8
VStarD+: P803.1 P803.2 P804.3 P804.4 | length 51.9
  Top Layer w1.27: v4(97.6,33.3) 95.75,33.3 v4(95.7,33.25) 94.661,34.289 94.661,65.376 101.8,72.515 101.8,73.75
  Bottom Layer w1.27: v4(95.7,33.25) 95.75,33.3 v4(97.6,33.3) 101.356,33.3 101.656,33
VStarD-: P803.3 P803.4 P804.1 P804.2 | length 55.1
  Top Layer w1.27: v4(97.7,30) v4(95.6,30) 93.213,32.387 93.213,66.813 98.7,72.3 98.7,73.9
  Bottom Layer w1.27: v4(95.6,30) v4(97.7,30) 101.4,30
pads on no net: M701.8 OP301.9
copper on no net:
  other v2: 20,5 24,5 28,5 32,5 36,5 40,5 44,5 48,5 64,5 68,5 72,5 76,5 80,5 84,5 88,5 92,5 96,5 204,5 233,5 313,5 20,9 24,9 28,9 32,9 36,9 40,9 44,9 48,9 52,9 64,9 68,9 72,9 76,9 80,9 84,9 88,9 92,9 96,9 100,9 128,9 136,9 144,9 152,9 160,9 168,9 176,9 184,9 192,9 233,9 241,9 249,9 257,9 289,9 297,9 305,9 317,9 20,13 24,13 28,13 40,13 44,13 48,13 52,13 64,13 68,13 72,13 76,13 88,13 92,13 100,13 136,13 148,13 152,13 156,13 160,13 172,13 176,13 180,13 184,13 233,13 261,13 265,13 269,13 293,13 309,13 20,17 24,17 28,17 40,17 44,17 48,17 52,17 64,17 68,17 72,17 76,17 88,17 92,17 96,17 128,17 136,17 148,17 152,17 156,17 160,17 172,17 176,17 180,17 184,17 196,17 233,17 241,17 257,17 265,17 269,17 281,17 289,17 293,17 305,17 313,17 145.5,20.275 20,21 24,21 28,21 32,21 40,21 44,21 48,21 52,21 64,21 68,21 72,21 76,21 88,21 92,21 100,21 148,21 152,21 156,21 160,21 172,21 176,21 180,21 184,21 196,21 200,21 257,21 261,21 285,21 289,21 293,21 305,21 309,21 317,21 128.798,23.7 20,25 24,25 28,25 32,25 40,25 44,25 48,25 52,25 64,25 68,25 72,25 76,25 88,25 92,25 96,25 100,25 152,25 156,25 160,25 172,25 176,25 180,25 184,25 196,25 200,25 204,25 245,25 257,25 261,25 265,25 269,25 281,25 285,25 289,25 293,25 305,25 309,25 313,25 138.1,27 16,29 32,29 40,29 44,29 48,29 52,29 64,29 68,29 72,29 76,29 88,29 92,29 124,29 152,29 156,29 160,29 172,29 176,29 180,29 184,29 196,29 200,29 204,29 208,29 233,29 237,29 241,29 245,29 257,29 261,29 265,29 269,29 281,29 285,29 289,29 293,29 305,29 309,29 313,29 32,33 40,33 44,33 48,33 52,33 76,33 88,33 92,33 152,33 156,33 160,33 184,33 196,33 200,33 204,33 208,33 245,33 257,33 261,33 265,33 269,33 293,33 305,33 309,33 313,33 76,37 88,37 92,37 100,37 184,37 196,37 200,37 204,37 208,37 245,37 293,37 305,37 309,37 313,37 32,41 40,41 44,41 48,41 52,41 76,41 88,41 92,41 100,41 152,41 156,41 160,41 184,41 196,41 200,41 204,41 208,41 245,41 257,41 261,41 265,41 269,41 293,41 305,41 309,41 313,41 123.205,44.6 32,45 40,45 44,45 48,45 52,45 64,45 68,45 72,45 76,45 88,45 92,45 152,45 156,45 160,45 172,45 176,45 180,45 184,45 196,45 200,45 204,45 208,45 233,45 237,45 241,45 245,45 257,45 261,45 265,45 269,45 281,45 285,45 289,45 293,45 305,45 309,45 313,45 138.1,46.9 20,49 24,49 28,49 32,49 40,49 44,49 48,49 52,49 64,49 68,49 72,49 76,49 88,49 92,49 152,49 156,49 160,49 172,49 176,49 180,49 184,49 196,49 200,49 204,49 208,49 245,49 257,49 261,49 265,49 269,49 281,49 285,49 289,49 293,49 305,49 309,49 313,49 20,53 24,53 28,53 32,53 40,53 44,53 48,53 52,53 64,53 68,53 72,53 76,53 88,53 92,53 96,53 100,53 128,53 148,53 152,53 156,53 160,53 172,53 176,53 180,53 184,53 196,53 200,53 204,53 257,53 261,53 265,53 269,53 281,53 285,53 289,53 293,53 305,53 309,53 313,53 145.2,53.7 20,57 28,57 40,57 44,57 48,57 52,57 64,57 68,57 72,57 76,57 88,57 92,57 96,57 100,57 128,57 136,57 148,57 152,57 156,57 160,57 172,57 176,57 180,57 184,57 196,57 200,57 233,57 241,57 257,57 261,57 265,57 269,57 281,57 285,57 289,57 293,57 305,57 309,57 313,57 20,61 40,61 44,61 48,61 52,61 64,61 68,61 72,61 76,61 88,61 92,61 96,61 100,61 136,61 148,61 152,61 156,61 160,61 172,61 176,61 180,61 184,61 196,61 257,61 261,61 265,61 269,61 281,61 285,61 289,61 293,61 305,61 309,61 313,61 36,65 40,65 44,65 48,65 52,65 56,65 60,65 64,65 68,65 72,65 76,65 88,65 92,65 96,65 100,65 128,65 132,65 136,65 144,65 152,65 158,65 176,65 184,65 200,65 233,65 241,65 249,65 257,65 265,65 281,65 289,65 305,65

## Polygon pours and split planes (outlines as drawn)
GND on Top Layer "Top Layer-AGND" (solid, remove dead copper, pour order 2): 0.297,89.358 328.897,89.358 328.897,0 0.297,0
V- on Top Layer "Top Layer-GND" (solid, pour order 0): 15.852,82 13.8,79.948 13.3,80.448 13.3,82 5.2,82 5.2,92.8 326.05,92.8 326.05,82 261.8,82 261.8,80.753 261.797,80.75 239.797,80.75 239.797,82 225.7,82 224.1,80.4 224.1,73.75 202.8,73.75 202.8,79.713 202.8,79.744 200.544,82 127.1,82 123.15,78.05 123.15,77.875 123.15,73.75 101.8,73.75 101.8,79.578 101.722,79.578 99.3,82 87.75,82 87.75,80.75 65.75,80.75 65.75,82
GND on Bottom Layer "Bottom Layer-AGND" (solid, pour order 4): 0,88.15 328.6,88.15 328.6,0 0,0

## Keep-outs
Keep-Out Layer:
  lines w0.254: 0,7 8.8,7 8.8,0 107.8,0 107.8,7 117.1,7 117.1,0 208.8,0 208.8,7 218.1,7 218.1,0 318.7,0 318.7,7.012 327.5,7.012 327.5,80 318.7,80 318.7,87 218.1,87 218.1,80 208.8,80 208.8,87 117.1,87 117.1,80 107.8,80 107.8,87 8.8,87 8.8,80 0,80 0,7 ; 14.55,31.5 26.75,31.5 26.75,42.5 14.55,42.5 14.55,31.5 ; 62.05,31.5 74.25,31.5 74.25,42.5 62.05,42.5 62.05,31.5 ; 121.8,31.5 121.8,42.5 134,42.5 134,31.5 121.8,31.5 ; 169.3,31.5 169.3,42.5 181.5,42.5 181.5,31.5 169.3,31.5 ; 230.55,31.5 242.75,31.5 242.75,42.5 230.55,42.5 230.55,31.5 ; 278.05,31.5 290.25,31.5 290.25,42.5 278.05,42.5 278.05,31.5

## Other copper
Top Layer:
  rectangle net VStarD+: 100.4,73 102.8,74.7
  rectangle net VStarD-: 97.55,73 99.7,74.7
  rectangle net NetPV601_2: 272.35,10.95 277.3,63.05
  rectangle net NetPV603_2: 163.6,10.95 168.65,63.05
  rectangle net NetPV605_2: 56.35,10.95 61.4,63.05
  rectangle net V-: 224.85,10.95 229.9,63
  rectangle net V-: 116.1,10.95 121.15,78.2
  rectangle net V-: 9.2,10.95 13.9,86.35
Bottom Layer:
  rectangle net V_out: 101.051,46.3 102.8,48.65
  rectangle net V-: 102.647,44 106,45.375
  rectangle net V-: 101.051,43.3 102.8,45.7
  rectangle net VIN6: 53.55,74.321 54.35,75.75
  rectangle net NetOP301_5: 52,77.45 56.1,78.5
  rectangle net VStarD+: 100.616,31.7 102.4,34.2
  rectangle net VStarD-: 100.6,28.8 102.4,31.2
  rectangle net NetD603_1: 80.55,72.2 84.45,75.6
  rectangle net NetD601_1: 296.55,73.6 300.45,77.9
  rectangle net NetD602_1: 187.8,73.6 191.7,77.9

## Silkscreen, mask and mechanical layers (free items; w line width, h text height)
Top Overlay:
  drawing of 4351 lines, arcs and shapes, not listed
  text "ADC_SPI_ / nCS_SD" at 88.2,86.5 h0.7 r270
  text "SPI_MOSI" at 91.041,86.4 h0.7 r270.39
  text "SPI_MISO" at 92.511,86.4 h0.7 r270
  text "SPI_CLK" at 93.981,85.8 h0.7 r270
  text "VStarD-" at 98.391,85.6 h0.7 r270
  text "VStarD-" at 99.861,85.6 h0.7 r270
  text "VStarD+" at 101.331,85.6 h0.7 r270
  text "VStarD+" at 102.801,85.6 h0.7 r270
  text "ZENITH" at 157,84.8 h2
  text "HYPERION: STARBOARD" at 13.723,83.506 h3
  text "GND" at 95.451,83.25 h0.7 r270
  text "3V3" at 96.921,83.1 h0.7 r270
  text "'.Print_Date'  V1.04 SVN XXXX" at 13.55,81.494 h2
  text "Nicholas J. Sorensen, Erik F. Halliwell" at 13.7,79.1 h2
  text "ANTIRAM" at 1.16,49.34 h2 r270
  text "RAM" at 325.15,46.95 h2 r270
  text "NADIR" at 158.5,0.5 h2
Bottom Overlay:
  text "ZENITH" at 167,84.735 h2
  text "VIN6" at 45.5,84 h0.8
  text "VIN1" at 156,78.7 h0.8
  text "Test Points: / TP101-VIN0 / TP102-VIN1 / TP103-VIN2 / TP104-VIN3 / TP105-VIN4 / TP106-VIN5 / TP107-VIN6 / TP108-VIN7" at 67.3,73.683 h0.7
  text "VIN4" at 150.85,73.1 h0.8
  text "VIN7" at 45.992,72.055 h0.8
  text "ADC_SPI_nCS_S" at 16.098,70.07 h0.7
  text "ADC_SPI_SD" at 16.098,68.6 h0.7
  text "SPI_MOSI" at 16.098,67.13 h0.7
  text "SPI_MISO" at 16.098,65.66 h0.7
  text "SPI_CLK" at 16.098,64.19 h0.7
  text "3V3" at 16.098,62.72 h0.7
  text "GND" at 16.098,61.25 h0.7
  text "StarboardKnifeReturn" at 16.198,59.78 h0.7
  text "SwitchUHF_S" at 16.098,58.31 h0.7
  text "VKnife" at 16.098,56.84 h0.7
  text "SwitchDeployable_S" at 16.098,55.37 h0.7
  text "UHFKnifeReturn_S" at 16.098,53.9 h0.7
  text "VStar+" at 108.1,47.8 h0.7
  text "VStar+" at 108.1,46.37 h0.7
  text "VStar-" at 108.1,44.9 h0.7
  text "VStar-" at 108.1,43.43 h0.7
  text "RAM" at 325.15,42.02 h2 r270
  text "ANTIRAM" at 1.27,36.66 h2 r270
  text "VStarD+" at 108.4,33.3 h0.7
  text "VStarD+" at 108.4,31.87 h0.7
  text "VStarD-" at 108.4,30.4 h0.7
  text "VStarD-" at 110.5,29 h0.7
  text "MAG2" at 106.7,16.37 h0.7
  text "MAG1" at 106.7,14.9 h0.7
  text "VIN2" at 52.9,10 h0.8
  text "VIN0" at 261.3,3.35 h0.8 r270
  text "VIN3" at 265.2,3.35 h0.8 r270
  text "VIN5" at 66,1.7 h0.8
  text "NADIR" at 166.5,0.5 h2
Mechanical 1:
  lines w0.254: 0,7 0,80 8.8,80 8.8,87 107.8,87 107.8,80 117.1,80 117.1,87 208.8,87 208.8,80 218.1,80 218.1,87 318.7,87 318.7,80 327.5,80 327.5,7.012 318.7,7.012 318.7,0 218.1,0 218.1,7 208.8,7 208.8,0 117.1,0 117.1,7 107.8,7 107.8,0 8.8,0 8.8,7 0,7 ; 14.55,31.5 14.55,42.5 26.75,42.5 26.75,31.5 14.55,31.5 ; 62.05,31.5 62.05,42.5 74.25,42.5 74.25,31.5 62.05,31.5 ; 121.8,31.5 134,31.5 134,42.5 121.8,42.5 121.8,31.5 ; 169.3,31.5 181.5,31.5 181.5,42.5 169.3,42.5 169.3,31.5 ; 230.55,31.5 230.55,42.5 242.75,42.5 242.75,31.5 230.55,31.5 ; 278.05,31.5 278.05,42.5 290.25,42.5 290.25,31.5 278.05,31.5

## Text inside footprints (layer, text, board x,y; h text height)
PV601: Top Overlay "+" at 299.135,63.67 h0.7 r90; Top Overlay "+" at 299.135,41.445 h0.7 r90; Top Overlay "+" at 299.135,19.22 h0.7 r90; Top Overlay "-" at 274.472,54.094 h0.7 r90; Top Overlay "-" at 274.5,40.556 h0.7 r90; Top Overlay "-" at 274.5,19.855 h0.7 r90
PV602: Top Overlay "+" at 251.635,63.67 h0.7 r90; Top Overlay "+" at 251.635,41.445 h0.7 r90; Top Overlay "+" at 251.635,19.22 h0.7 r90; Top Overlay "-" at 226.972,54.094 h0.7 r90; Top Overlay "-" at 227,40.556 h0.7 r90; Top Overlay "-" at 227,19.855 h0.7 r90
PV603: Top Overlay "-" at 165.75,19.855 h0.7 r90; Top Overlay "-" at 165.75,40.556 h0.7 r90; Top Overlay "-" at 165.722,54.094 h0.7 r90; Top Overlay "+" at 190.385,19.22 h0.7 r90; Top Overlay "+" at 190.385,41.445 h0.7 r90; Top Overlay "+" at 190.385,63.67 h0.7 r90
PV604: Top Overlay "+" at 142.885,63.67 h0.7 r90; Top Overlay "+" at 142.885,41.445 h0.7 r90; Top Overlay "+" at 142.885,19.22 h0.7 r90; Top Overlay "-" at 118.222,54.094 h0.7 r90; Top Overlay "-" at 118.25,40.556 h0.7 r90; Top Overlay "-" at 118.25,19.855 h0.7 r90
PV605: Top Overlay "-" at 58.5,19.855 h0.7 r90; Top Overlay "-" at 58.5,40.556 h0.7 r90; Top Overlay "-" at 58.472,54.094 h0.7 r90; Top Overlay "+" at 83.135,19.22 h0.7 r90; Top Overlay "+" at 83.135,41.445 h0.7 r90; Top Overlay "+" at 83.135,63.67 h0.7 r90
PV606: Top Overlay "+" at 35.635,63.67 h0.7 r90; Top Overlay "+" at 35.635,41.445 h0.7 r90; Top Overlay "+" at 35.635,19.22 h0.7 r90; Top Overlay "-" at 10.972,54.094 h0.7 r90; Top Overlay "-" at 11,40.556 h0.7 r90; Top Overlay "-" at 11,19.855 h0.7 r90